# Altium PCB Gesture.PcbDoc
Units mm, origin at the board's own origin, x right, y up, seen from the top; angles counter-clockwise.
Board outline 7.24 x 8.25 mm, 2 copper layers (Top Layer, Bottom Layer); 7 components, 7 nets, 27 pads, 11 vias.
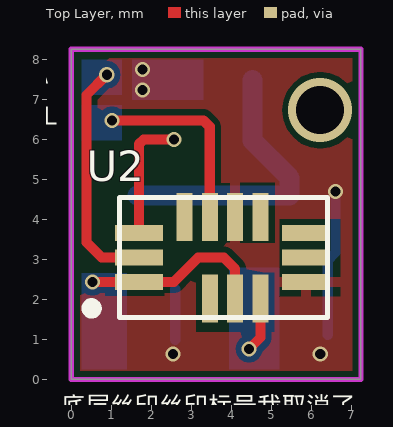
[diagram p0: Top Layer view]
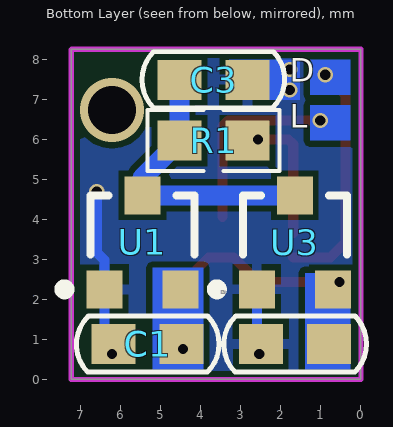
[diagram p1: Bottom Layer view, seen from below]

## Layer stack, top to bottom
Top Solder: solder mask 0.0102, Solder Resist, Dk 3.5
Top Layer: signal copper 0.0356
Dielectric1: dielectric 0.32, FR-4, Dk 4.8
Bottom Layer: signal copper 0.0356
Bottom Solder: solder mask 0.0102, Solder Resist, Dk 3.5

## Board outline
0,0 0,8.255 7.239,8.255 7.24,8.254 7.24,0

## Design rules (kind name [scope] priority, off if disabled: settings)
Clearance [All] p1: gap=0.152 ignorepadtopadclearanceinfootprint=FALSE except(0: Arc-Hole Track-Hole SMDPad-Hole THPad-Hole Via-Hole Fill-Hole Poly-Hole Region-Hole Text-Hole)
ComponentClearance [All] p1: gap=0 collisioncheckmode=3 verticalgap=0 showdistances=FALSE
MinimumSolderMaskSliver [All] p1: minsoldermaskwidth=0
PolygonConnect PolygonConnect_1 [All vs IsVia] p1: connectstyle=Direct reliefconductorwidth=0.254 reliefentries=4 polygonreliefangle="90 Angle" airgapwidth=0.254
PolygonConnect [All] p2: connectstyle=Relief reliefconductorwidth=0.254 reliefentries=4 polygonreliefangle="90 Angle" airgapwidth=0.254
RoutingVias [All] p1: holewidth=0.711 width=1.27 viastyle="Through Hole" minholewidth=0.1 minwidth=0.1 maxholewidth=2 maxwidth=3
SilkToSilkClearance [All] p1: silktosilkclearance=0
SilkToSolderMaskClearance SilkscreenOverComponentPads [IsPad] p1: minsilkscreentomaskgap=-1 clearancetoexposedcopper=TRUE
SolderMaskExpansion [All] p1: expansion=0.102
Width [All] p1: maxlimit=1 minlimit=0.254 preferedwidth=0.254
26 further rules are at their usual default settings.

## Components (designator, comment, footprint, x,y, rotation, side; value= is the part's Value field where it differs from the comment)
C1 "0.1uF" C0603 5.334,0.889 r180 bottom
C3 "0.1uF" C0603 3.683,7.493 r0 bottom
C4 "0.1uF" C0603 1.651,0.889 r180 bottom
R1 "4.7K" 0603-1 3.683,5.969 r0 bottom
U1 "LR1107" SOT23A 5.461,3.429 r180 bottom
U2 "PAJ7620" PAJ7620 3.81,3.048 r0 bottom
U3 "LR1107" SOT23A 1.651,3.429 r180 bottom

## Footprints (in the part's own frame and the unit in brackets; to place one, negate y for a bottom-side part, rotate by r counter-clockwise, add the part's x,y. Pads: shape width x height; smd on the part's side, far side on the other; paste and mask are expansions set on the pad)
0603-1 [mm]
  rect 1.1x1 smd: 1(-0.85,0) 2(0.85,0)
  silkscreen extent -1.65,-0.76 1.65,0.76, body extent -1.14,-0.38 1.14,0.38, height 1
C0603 [mm]
  rect 1.1x1 smd: 1(-0.85,0) 2(0.85,0)
  silkscreen extent -1.78,-0.7 1.79,0.7
PAJ7620 [mm]
  rect 1.2x0.4 smd far side: 1(-2.12,0.61) 2(-2.12,0) 3(-2.12,-0.61) 8(2.06,-0.61) 9(2.06,0) 10(2.06,0.61)
  rect 0.4x1.2 smd far side: 4(-0.983,-1.02) 5(-0.348,-1.02) 6(0.287,-1.02) 7(0.922,-1.02) 11(0.922,1.02) 12(0.287,1.02) 13(-0.348,1.02)
SOT23A [mm] "SOT-23; 3 Leads; Body 3.0 x 2.5 mm, inc. leads (LxW"
  rect 0.9x0.95 smd: 1(-0.95,-1.175) 2(0.95,-1.175) 3(0,1.175)
  silkscreen extent -2.07,-1.3 1.3,1.18

## Part data
C1 C3 C4: library part Cap
R1: library part Res1, "Resistor"
U1 U3: library part XC6206

## Via types
v1: diameter 0.381, hole 0.254, Top Layer to Bottom Layer, 10 vias
v2: diameter 1.6, hole 1.2, Top Layer to Bottom Layer, 1 vias

## Nets (pads, with @x,y where several pads share a name; then routed paths per layer and width w, separated by ;. In a path a pad name is that pad's centre, name@x,y a point inside that pad or via, vN(x,y) a via of type N, cw(c..) or ccw(c..) an arc to the next point about the centre after c; other vN are vias at no path point)
GND: C1.1 C3.1 C4.1 U1.1 U2.6 U2.10 U3.1 | length 4.9
  Bottom Layer w0.254: C4.1@2.601,0.989 U3.1 ; C1.1@6.411,1.116 U1.1 6.411,2.982 6.604,3.175 v1(6.604,4.699)
  other v1: 2.54,0.635 6.223,0.635 1.778,7.239 1.778,7.747
INT: R1.1 U2.3 | length 3.2
  Top Layer w0.254: U2.3 1.69,5.881 1.808,5.999 v1(2.57,5.999)
SCL: U2.5 | length 4.8
  Top Layer w0.254: v1(1.016,6.477) 3.302,6.477 3.462,6.317 U2.5
SDA: U2.2 | length 5.9
  Top Layer w0.254: v1(0.889,7.62) 0.381,7.112 0.381,3.429 0.762,3.048 U2.2
VBUS: C4.2 U2.1 U2.12 U3.2 | length 4.7
  Top Layer w0.254: v1(0.533,2.438) U2.1 2.565,2.438 3.175,3.048 3.81,3.048 4.097,2.761 U2.12
VIN: C3.2 R1.2 U1.3 U3.3 | length 7.1
  Bottom Layer w0.5: U3.3 U1.3 5.461,5.041 R1.2 C3.2
VLED: C1.2 U1.2 U2.11 | length 1.4
  Top Layer w0.254: v1(4.445,0.762) 4.732,1.049 U2.11
pads on no net: U2.4 U2.7 U2.8 U2.9 U2.13
copper on no net:
  other v2: 6.223,6.731

## Polygon pours and split planes (outlines as drawn)
GND on Bottom Layer "BottomLayer-GND" (solid, remove dead copper, pour order 2): 0,8.255 7.239,8.255 7.239,0.001 7.24,0 0,0
GND on Top Layer "BottomLayer-GND" (solid, remove dead copper, pour order 4): 0,8.255 7.239,8.255 7.24,8.254 7.24,0 0,0

## Keep-outs
Keep-Out Layer:
  lines w0.127: 7.24,0 0,0 0,8.255 7.239,8.255 7.24,8.254 7.24,0.001

## Other copper
Bottom Layer:
  rectangle net SDA: 0.254,7.112 1.27,8.001
  rectangle net SCL: 0.254,5.969 1.27,6.858
  rectangle net GND: 1.524,6.985 3.302,8.001
  rectangle net VLED: 3.937,0.254 5.207,2.794
  rectangle net VBUS: 0.254,0.254 1.397,2.667

## Silkscreen, mask and mechanical layers (free items; w line width, h text height)
Top Overlay:
  text "VIN、GND、INT从电阻和电容飞线" at -0.889,9.017 h0.76
  text "飞线SDA" at -2.921,7.239 h0.76
  text "SCL" at -1.524,6.223 h0.76
  text "底层丝印丝印标号我取消了" at -0.254,-1.016 h0.76
Bottom Overlay:
  text "D" at 1.778,7.239 h1
  text "L" at 1.778,6.096 h1
Bottom Solder:
  rectangle: 0.254,7.112 1.27,8.001
  rectangle: 0.254,5.969 1.27,6.858
Mechanical 1:
  the board outline again, w0.127